# EAGLE board IMU_Digital_Combo_Board _-_6_Degrees_of_Freedom_-_ITG3200_-_ADXL345-Panel-v11 (EAGLE 6.5.0), part 1 of 4
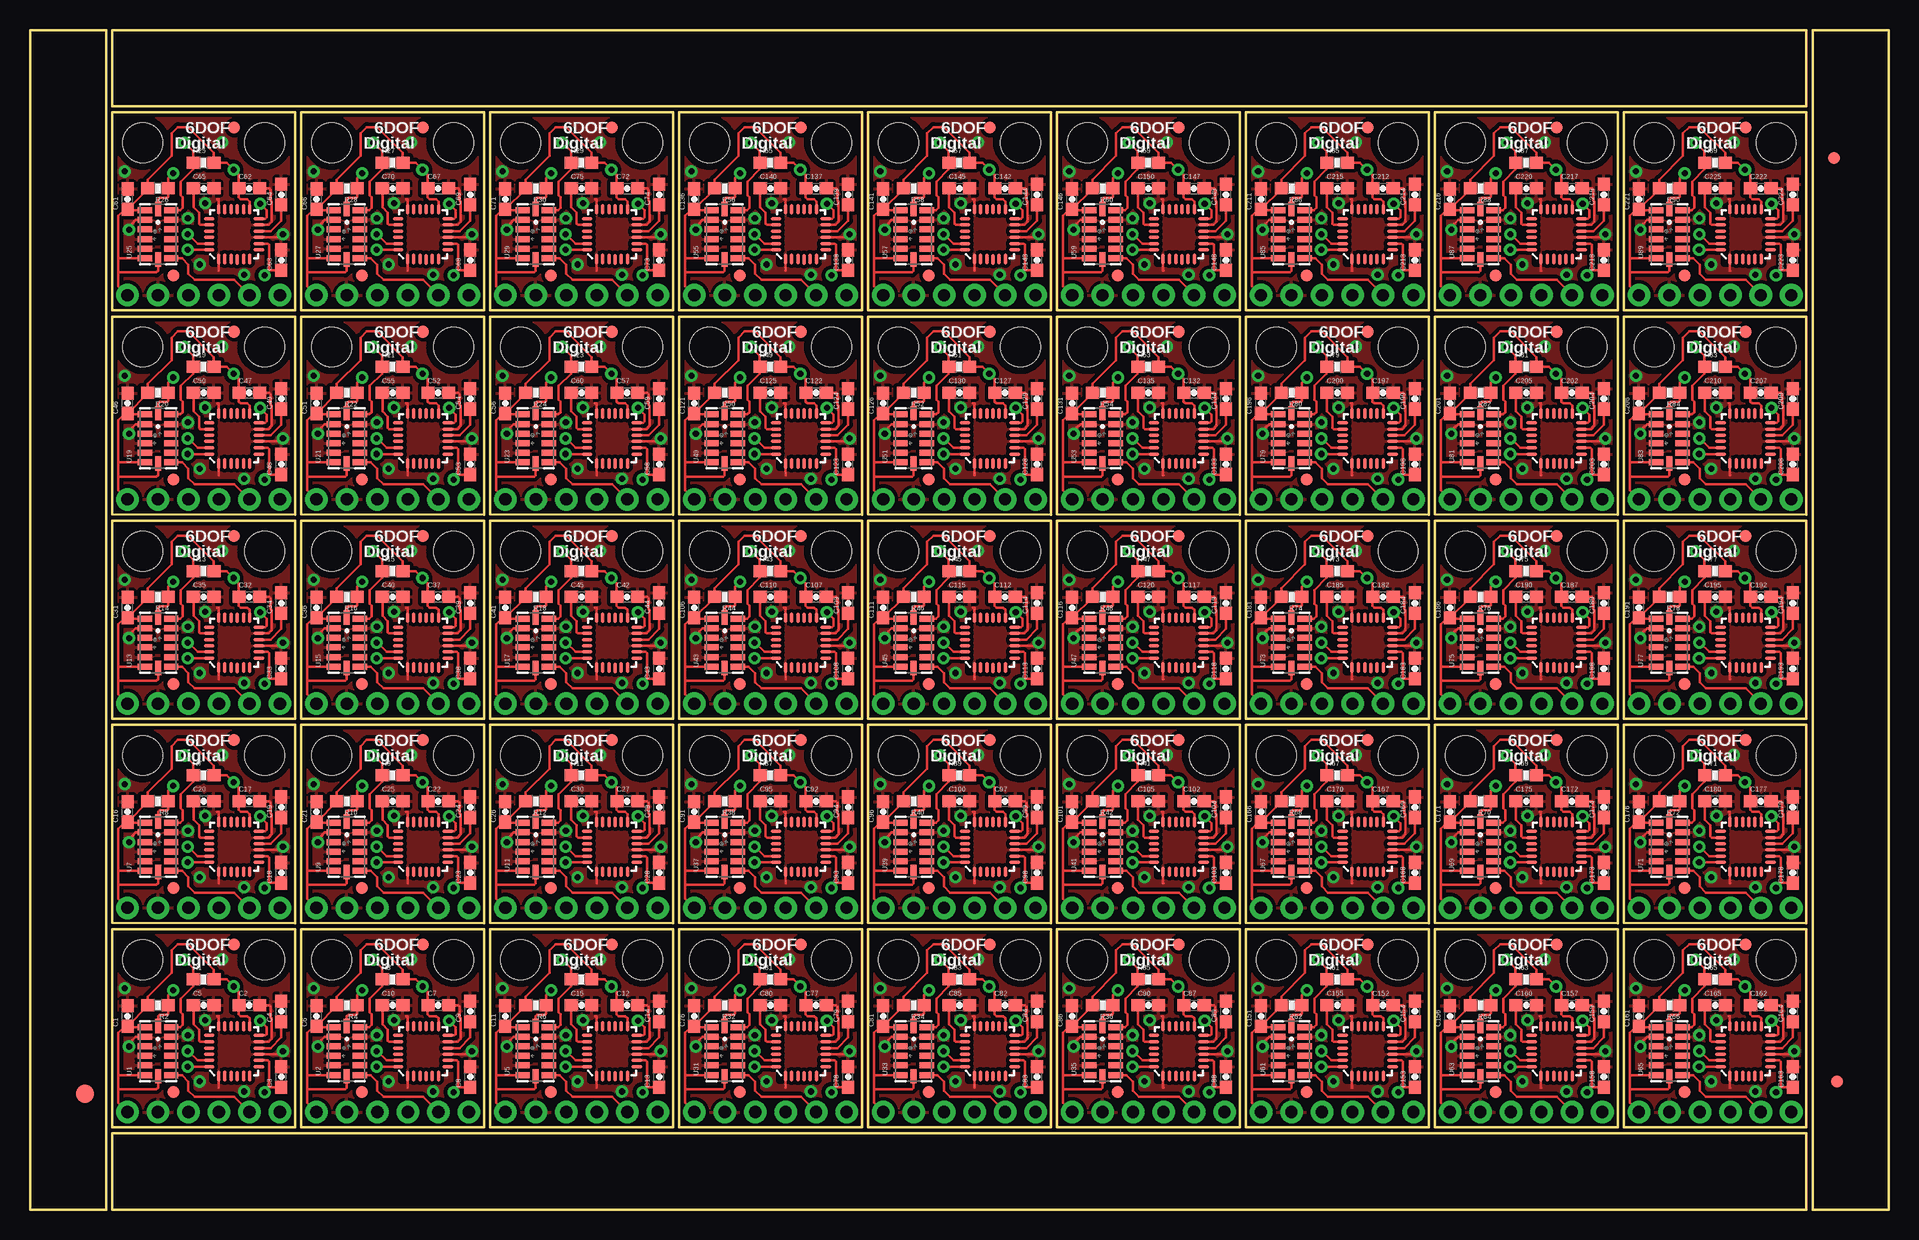
[diagram p0: board, top side]
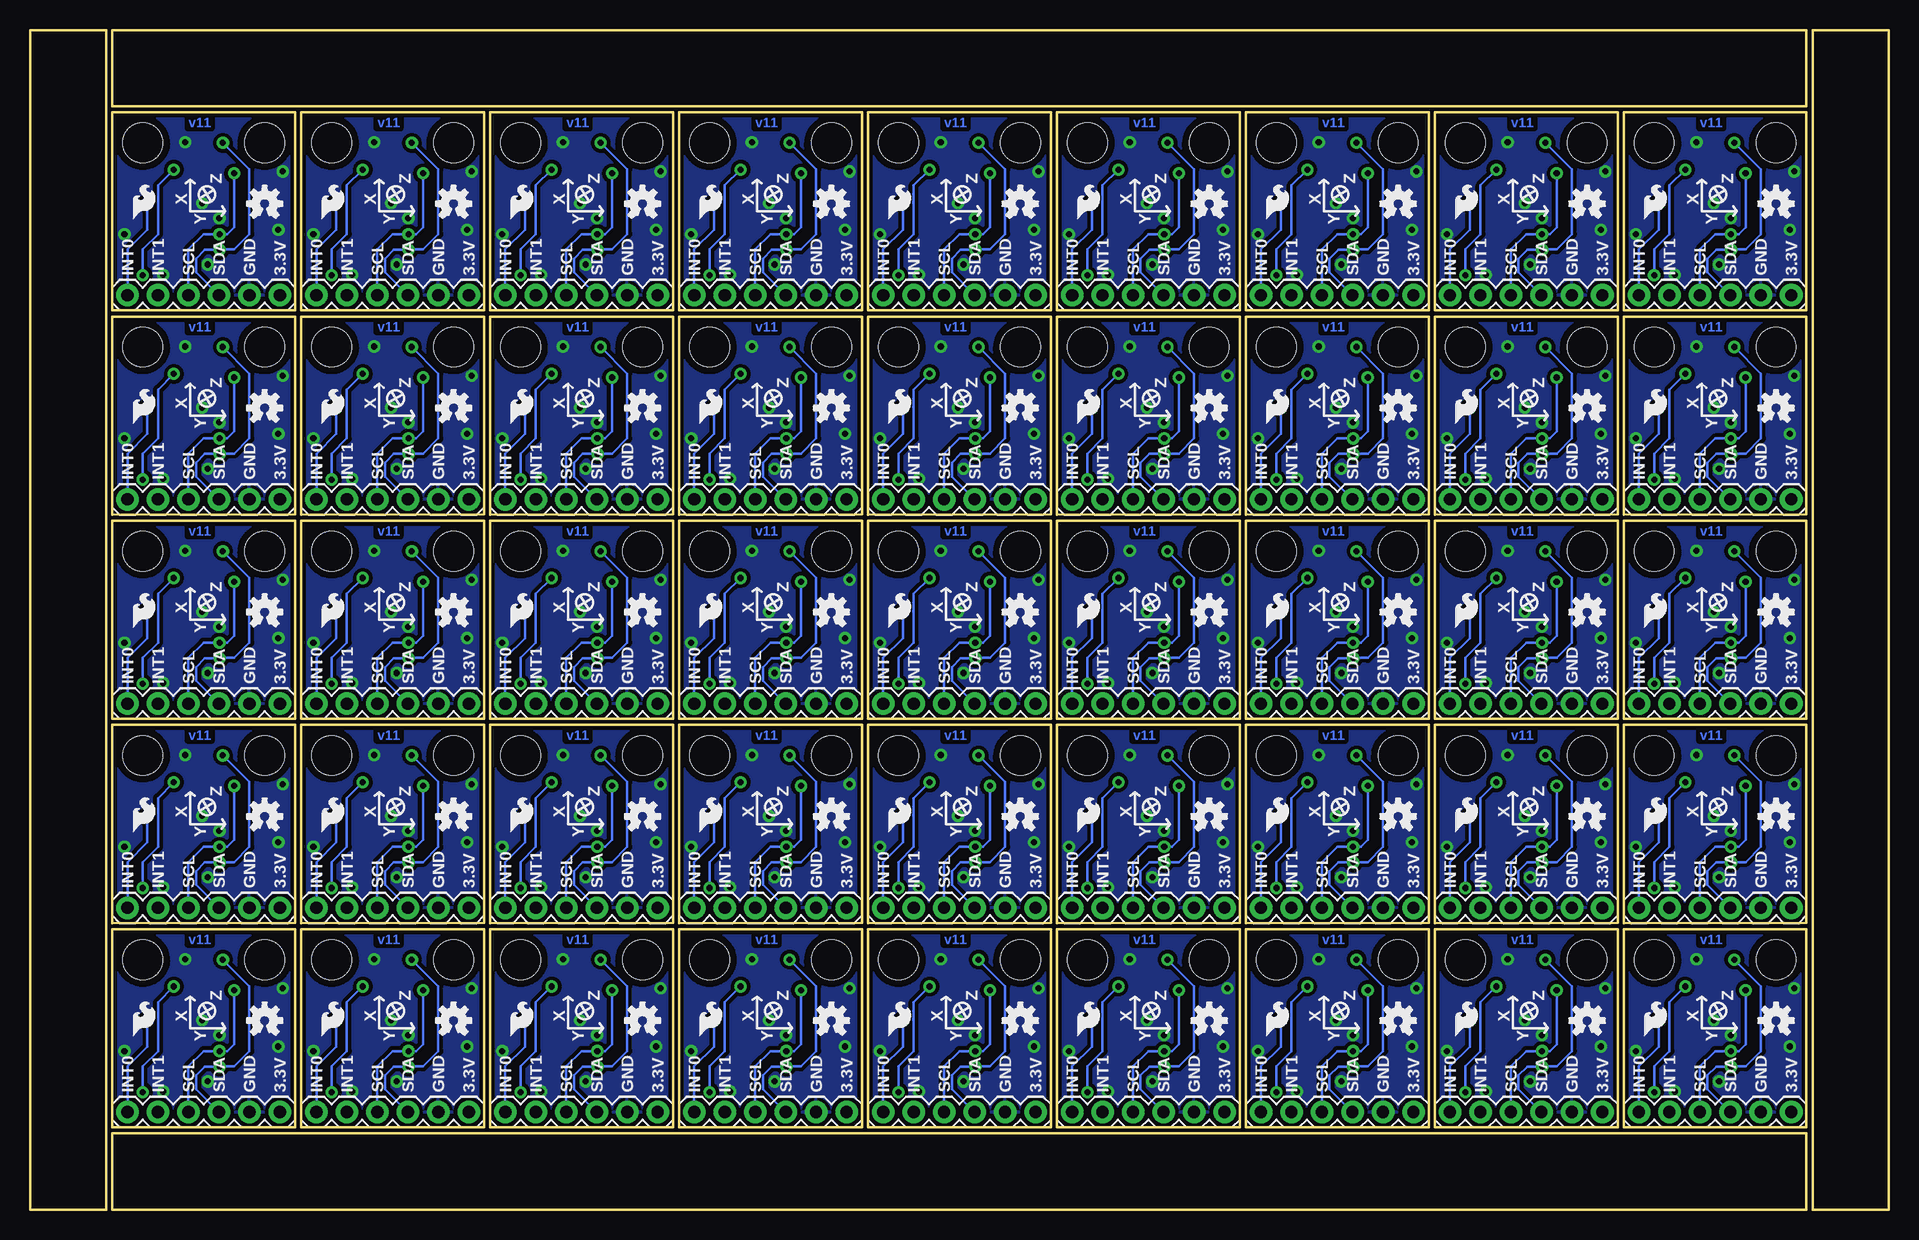
[diagram p1: board, bottom side, seen from below]

Size 154.94 x 98.3 mm. Coordinates in mm from the lower left corner, seen from the top.
Outline: 196 segments
Copper layers (1*16): Top 0.035mm / dielectric 1.5mm / Bottom 0.035mm
Design rules "SparkFun": minimum track width 8mil, minimum drill 20mil, track to track 8mil, track to pad 8mil, pad to pad 8mil, via to via 8mil, smd to smd 8mil, copper to edge 8mil, drill to drill 8mil, minimum pad ring 12mil, minimum via ring 10mil, stop-mask expansion 4mil, vias tented up to drill 20mil, thermal gap 10mil
tRestrict: area 15.2,10.8 to 15.5,11.3; area 15.4,15 to 15.5,15.5; area 10.3,12.6 to 10.7,13; area 9.5,12.3 to 9.7,12.5; area 31,10.8 to 31.2,11.3; area 31.1,15 to 31.2,15.5; area 26,12.6 to 26.4,13; area 25.2,12.3 to 25.4,12.5; area 46.7,10.8 to 47,11.3; area 46.9,15 to 47,15.5; area 41.8,12.6 to 42.2,13; area 41,12.3 to 41.2,12.5; 168 more areas

## Footprints (pad centres in the part's own frame; a part is rotated, then mirrored left to right if it is on the bottom)
0603-CAP = smd 1.1 x 1: 1 -0.85,0; 2 0.85,0
FIDUCIAL-1.5X3 = smd 1.5 x 1.5: 1 0,0
FIDUCIAL-1X2 = smd 1 x 1: 1 0,0
1X06 = drill 1.016 pad 1.88: 1 0,0; 2 2.54,0; 3 5.08,0; 4 7.62,0; 5 10.16,0; 6 12.7,0
STAND-OFF = hole 3.302: 0,0
0603-RES = smd 1.1 x 1: 1 -0.85,0; 2 0.85,0
LGA14 = smd 0.5 x 1.2: 1 2,1.1; 2 1.2,1.1; 3 0.4,1.1; 4 -0.4,1.1; 5 -1.2,1.1; 6 -2,1.1; 8 -2,-1.1; 9 -1.2,-1.1; 10 -0.4,-1.1; 11 0.4,-1.1; 12 1.2,-1.1; 13 2,-1.1 | smd 1.2 x 0.5: 7 -2.1,0; 14 2.1,0
QFN-24_ITG3200_1:1 = smd 0.889 x 0.279: 1 -2.076,1.301; 2 -2.076,0.775; 3 -2.076,0.25; 4 -2.102,-0.25; 5 -2.076,-0.775; 6 -2.076,-1.301; 13 2.076,-1.301; 14 2.076,-0.775; 15 2.076,-0.25; 16 2.076,0.25; 17 2.076,0.775; 18 2.076,1.301 | smd 0.279 x 0.889: 7 -1.301,-2.076; 8 -0.775,-2.076; 9 -0.25,-2.076; 10 0.25,-2.076; 11 0.775,-2.076; 12 1.301,-2.076; 19 1.301,2.076; 20 0.775,2.076; 21 0.25,2.076; 22 -0.25,2.076; 23 -0.775,2.076; 24 -1.301,2.076

## Placement (x,y rotation side)
C1  0.1uF  [0603-CAP]  8.13,16.13 90 top
C2  0.1uF  [0603-CAP]  18.29,17.02 0 top
C3  10nF  [0603-CAP]  20.95,11.05 90 top
C4  0.1uF  [0603-CAP]  20.95,16.51 90 top
C5  2.2nF  [0603-CAP]  14.48,17.02 0 top
C6  0.1uF  [0603-CAP]  23.88,16.13 90 top
C7  0.1uF  [0603-CAP]  34.04,17.02 0 top
C8  10nF  [0603-CAP]  36.7,11.05 90 top
C9  0.1uF  [0603-CAP]  36.7,16.51 90 top
C10  2.2nF  [0603-CAP]  30.23,17.02 0 top
C11  0.1uF  [0603-CAP]  39.62,16.13 90 top
C12  0.1uF  [0603-CAP]  49.78,17.02 0 top
C13  10nF  [0603-CAP]  52.45,11.05 90 top
C14  0.1uF  [0603-CAP]  52.45,16.51 90 top
C15  2.2nF  [0603-CAP]  45.97,17.02 0 top
C16  0.1uF  [0603-CAP]  8.13,33.15 90 top
C17  0.1uF  [0603-CAP]  18.29,34.04 0 top
C18  10nF  [0603-CAP]  20.95,28.07 90 top
C19  0.1uF  [0603-CAP]  20.95,33.53 90 top
C20  2.2nF  [0603-CAP]  14.48,34.04 0 top
C21  0.1uF  [0603-CAP]  23.88,33.15 90 top
C22  0.1uF  [0603-CAP]  34.04,34.04 0 top
C23  10nF  [0603-CAP]  36.7,28.07 90 top
C24  0.1uF  [0603-CAP]  36.7,33.53 90 top
C25  2.2nF  [0603-CAP]  30.23,34.04 0 top
C26  0.1uF  [0603-CAP]  39.62,33.15 90 top
C27  0.1uF  [0603-CAP]  49.78,34.04 0 top
C28  10nF  [0603-CAP]  52.45,28.07 90 top
C29  0.1uF  [0603-CAP]  52.45,33.53 90 top
C30  2.2nF  [0603-CAP]  45.97,34.04 0 top
C31  0.1uF  [0603-CAP]  8.13,50.16 90 top
C32  0.1uF  [0603-CAP]  18.29,51.05 0 top
C33  10nF  [0603-CAP]  20.95,45.09 90 top
C34  0.1uF  [0603-CAP]  20.95,50.55 90 top
C35  2.2nF  [0603-CAP]  14.48,51.05 0 top
C36  0.1uF  [0603-CAP]  23.88,50.16 90 top
C37  0.1uF  [0603-CAP]  34.04,51.05 0 top
C38  10nF  [0603-CAP]  36.7,45.09 90 top
C39  0.1uF  [0603-CAP]  36.7,50.55 90 top
C40  2.2nF  [0603-CAP]  30.23,51.05 0 top
C41  0.1uF  [0603-CAP]  39.62,50.16 90 top
C42  0.1uF  [0603-CAP]  49.78,51.05 0 top
C43  10nF  [0603-CAP]  52.45,45.09 90 top
C44  0.1uF  [0603-CAP]  52.45,50.55 90 top
C45  2.2nF  [0603-CAP]  45.97,51.05 0 top
C46  0.1uF  [0603-CAP]  8.13,67.18 90 top
C47  0.1uF  [0603-CAP]  18.29,68.07 0 top
C48  10nF  [0603-CAP]  20.95,62.1 90 top
C49  0.1uF  [0603-CAP]  20.95,67.56 90 top
C50  2.2nF  [0603-CAP]  14.48,68.07 0 top
C51  0.1uF  [0603-CAP]  23.88,67.18 90 top
C52  0.1uF  [0603-CAP]  34.04,68.07 0 top
C53  10nF  [0603-CAP]  36.7,62.1 90 top
C54  0.1uF  [0603-CAP]  36.7,67.56 90 top
C55  2.2nF  [0603-CAP]  30.23,68.07 0 top
C56  0.1uF  [0603-CAP]  39.62,67.18 90 top
C57  0.1uF  [0603-CAP]  49.78,68.07 0 top
C58  10nF  [0603-CAP]  52.45,62.1 90 top
C59  0.1uF  [0603-CAP]  52.45,67.56 90 top
C60  2.2nF  [0603-CAP]  45.97,68.07 0 top
C61  0.1uF  [0603-CAP]  8.13,84.2 90 top
C62  0.1uF  [0603-CAP]  18.29,85.09 0 top
C63  10nF  [0603-CAP]  20.95,79.12 90 top
C64  0.1uF  [0603-CAP]  20.95,84.58 90 top
C65  2.2nF  [0603-CAP]  14.48,85.09 0 top
C66  0.1uF  [0603-CAP]  23.88,84.2 90 top
C67  0.1uF  [0603-CAP]  34.04,85.09 0 top
C68  10nF  [0603-CAP]  36.7,79.12 90 top
C69  0.1uF  [0603-CAP]  36.7,84.58 90 top
C70  2.2nF  [0603-CAP]  30.23,85.09 0 top
C71  0.1uF  [0603-CAP]  39.62,84.2 90 top
C72  0.1uF  [0603-CAP]  49.78,85.09 0 top
C73  10nF  [0603-CAP]  52.45,79.12 90 top
C74  0.1uF  [0603-CAP]  52.45,84.58 90 top
C75  2.2nF  [0603-CAP]  45.97,85.09 0 top
C76  0.1uF  [0603-CAP]  55.37,16.13 90 top
C77  0.1uF  [0603-CAP]  65.53,17.02 0 top
C78  10nF  [0603-CAP]  68.2,11.05 90 top
C79  0.1uF  [0603-CAP]  68.2,16.51 90 top
C80  2.2nF  [0603-CAP]  61.72,17.02 0 top
C81  0.1uF  [0603-CAP]  71.12,16.13 90 top
C82  0.1uF  [0603-CAP]  81.28,17.02 0 top
C83  10nF  [0603-CAP]  83.95,11.05 90 top
C84  0.1uF  [0603-CAP]  83.95,16.51 90 top
C85  2.2nF  [0603-CAP]  77.47,17.02 0 top
C86  0.1uF  [0603-CAP]  86.87,16.13 90 top
C87  0.1uF  [0603-CAP]  97.03,17.02 0 top
C88  10nF  [0603-CAP]  99.69,11.05 90 top
C89  0.1uF  [0603-CAP]  99.69,16.51 90 top
C90  2.2nF  [0603-CAP]  93.22,17.02 0 top
C91  0.1uF  [0603-CAP]  55.37,33.15 90 top
C92  0.1uF  [0603-CAP]  65.53,34.04 0 top
C93  10nF  [0603-CAP]  68.2,28.07 90 top
C94  0.1uF  [0603-CAP]  68.2,33.53 90 top
C95  2.2nF  [0603-CAP]  61.72,34.04 0 top
C96  0.1uF  [0603-CAP]  71.12,33.15 90 top
C97  0.1uF  [0603-CAP]  81.28,34.04 0 top
C98  10nF  [0603-CAP]  83.95,28.07 90 top
C99  0.1uF  [0603-CAP]  83.95,33.53 90 top
C100  2.2nF  [0603-CAP]  77.47,34.04 0 top
C101  0.1uF  [0603-CAP]  86.87,33.15 90 top
C102  0.1uF  [0603-CAP]  97.03,34.04 0 top
C103  10nF  [0603-CAP]  99.69,28.07 90 top
C104  0.1uF  [0603-CAP]  99.69,33.53 90 top
C105  2.2nF  [0603-CAP]  93.22,34.04 0 top
C106  0.1uF  [0603-CAP]  55.37,50.16 90 top
C107  0.1uF  [0603-CAP]  65.53,51.05 0 top
C108  10nF  [0603-CAP]  68.2,45.09 90 top
C109  0.1uF  [0603-CAP]  68.2,50.55 90 top
C110  2.2nF  [0603-CAP]  61.72,51.05 0 top
C111  0.1uF  [0603-CAP]  71.12,50.16 90 top
C112  0.1uF  [0603-CAP]  81.28,51.05 0 top
C113  10nF  [0603-CAP]  83.95,45.09 90 top
C114  0.1uF  [0603-CAP]  83.95,50.55 90 top
C115  2.2nF  [0603-CAP]  77.47,51.05 0 top
C116  0.1uF  [0603-CAP]  86.87,50.16 90 top
C117  0.1uF  [0603-CAP]  97.03,51.05 0 top
C118  10nF  [0603-CAP]  99.69,45.09 90 top
C119  0.1uF  [0603-CAP]  99.69,50.55 90 top
C120  2.2nF  [0603-CAP]  93.22,51.05 0 top
C121  0.1uF  [0603-CAP]  55.37,67.18 90 top
C122  0.1uF  [0603-CAP]  65.53,68.07 0 top
C123  10nF  [0603-CAP]  68.2,62.1 90 top
C124  0.1uF  [0603-CAP]  68.2,67.56 90 top
C125  2.2nF  [0603-CAP]  61.72,68.07 0 top
C126  0.1uF  [0603-CAP]  71.12,67.18 90 top
C127  0.1uF  [0603-CAP]  81.28,68.07 0 top
C128  10nF  [0603-CAP]  83.95,62.1 90 top
C129  0.1uF  [0603-CAP]  83.95,67.56 90 top
C130  2.2nF  [0603-CAP]  77.47,68.07 0 top
C131  0.1uF  [0603-CAP]  86.87,67.18 90 top
C132  0.1uF  [0603-CAP]  97.03,68.07 0 top
C133  10nF  [0603-CAP]  99.69,62.1 90 top
C134  0.1uF  [0603-CAP]  99.69,67.56 90 top
C135  2.2nF  [0603-CAP]  93.22,68.07 0 top
C136  0.1uF  [0603-CAP]  55.37,84.2 90 top
C137  0.1uF  [0603-CAP]  65.53,85.09 0 top
C138  10nF  [0603-CAP]  68.2,79.12 90 top
C139  0.1uF  [0603-CAP]  68.2,84.58 90 top
C140  2.2nF  [0603-CAP]  61.72,85.09 0 top
C141  0.1uF  [0603-CAP]  71.12,84.2 90 top
C142  0.1uF  [0603-CAP]  81.28,85.09 0 top
C143  10nF  [0603-CAP]  83.95,79.12 90 top
C144  0.1uF  [0603-CAP]  83.95,84.58 90 top
C145  2.2nF  [0603-CAP]  77.47,85.09 0 top
C146  0.1uF  [0603-CAP]  86.87,84.2 90 top
C147  0.1uF  [0603-CAP]  97.03,85.09 0 top
C148  10nF  [0603-CAP]  99.69,79.12 90 top
C149  0.1uF  [0603-CAP]  99.69,84.58 90 top
C150  2.2nF  [0603-CAP]  93.22,85.09 0 top
C151  0.1uF  [0603-CAP]  102.62,16.13 90 top
C152  0.1uF  [0603-CAP]  112.78,17.02 0 top
C153  10nF  [0603-CAP]  115.44,11.05 90 top
C154  0.1uF  [0603-CAP]  115.44,16.51 90 top
C155  2.2nF  [0603-CAP]  108.97,17.02 0 top
C156  0.1uF  [0603-CAP]  118.36,16.13 90 top
C157  0.1uF  [0603-CAP]  128.52,17.02 0 top
C158  10nF  [0603-CAP]  131.19,11.05 90 top
C159  0.1uF  [0603-CAP]  131.19,16.51 90 top
C160  2.2nF  [0603-CAP]  124.71,17.02 0 top
C161  0.1uF  [0603-CAP]  134.11,16.13 90 top
C162  0.1uF  [0603-CAP]  144.27,17.02 0 top
C163  10nF  [0603-CAP]  146.94,11.05 90 top
C164  0.1uF  [0603-CAP]  146.94,16.51 90 top
C165  2.2nF  [0603-CAP]  140.46,17.02 0 top
C166  0.1uF  [0603-CAP]  102.62,33.15 90 top
C167  0.1uF  [0603-CAP]  112.78,34.04 0 top
C168  10nF  [0603-CAP]  115.44,28.07 90 top
C169  0.1uF  [0603-CAP]  115.44,33.53 90 top
C170  2.2nF  [0603-CAP]  108.97,34.04 0 top
C171  0.1uF  [0603-CAP]  118.36,33.15 90 top
C172  0.1uF  [0603-CAP]  128.52,34.04 0 top
C173  10nF  [0603-CAP]  131.19,28.07 90 top
C174  0.1uF  [0603-CAP]  131.19,33.53 90 top
C175  2.2nF  [0603-CAP]  124.71,34.04 0 top
C176  0.1uF  [0603-CAP]  134.11,33.15 90 top
C177  0.1uF  [0603-CAP]  144.27,34.04 0 top
C178  10nF  [0603-CAP]  146.94,28.07 90 top
C179  0.1uF  [0603-CAP]  146.94,33.53 90 top
C180  2.2nF  [0603-CAP]  140.46,34.04 0 top
C181  0.1uF  [0603-CAP]  102.62,50.16 90 top
C182  0.1uF  [0603-CAP]  112.78,51.05 0 top
C183  10nF  [0603-CAP]  115.44,45.09 90 top
C184  0.1uF  [0603-CAP]  115.44,50.55 90 top
C185  2.2nF  [0603-CAP]  108.97,51.05 0 top
C186  0.1uF  [0603-CAP]  118.36,50.16 90 top
C187  0.1uF  [0603-CAP]  128.52,51.05 0 top
C188  10nF  [0603-CAP]  131.19,45.09 90 top
C189  0.1uF  [0603-CAP]  131.19,50.55 90 top
C190  2.2nF  [0603-CAP]  124.71,51.05 0 top
C191  0.1uF  [0603-CAP]  134.11,50.16 90 top
C192  0.1uF  [0603-CAP]  144.27,51.05 0 top
C193  10nF  [0603-CAP]  146.94,45.09 90 top
C194  0.1uF  [0603-CAP]  146.94,50.55 90 top
C195  2.2nF  [0603-CAP]  140.46,51.05 0 top
C196  0.1uF  [0603-CAP]  102.62,67.18 90 top
C197  0.1uF  [0603-CAP]  112.78,68.07 0 top
C198  10nF  [0603-CAP]  115.44,62.1 90 top
C199  0.1uF  [0603-CAP]  115.44,67.56 90 top
C200  2.2nF  [0603-CAP]  108.97,68.07 0 top
C201  0.1uF  [0603-CAP]  118.36,67.18 90 top
C202  0.1uF  [0603-CAP]  128.52,68.07 0 top
C203  10nF  [0603-CAP]  131.19,62.1 90 top
C204  0.1uF  [0603-CAP]  131.19,67.56 90 top
C205  2.2nF  [0603-CAP]  124.71,68.07 0 top
C206  0.1uF  [0603-CAP]  134.11,67.18 90 top
C207  0.1uF  [0603-CAP]  144.27,68.07 0 top
C208  10nF  [0603-CAP]  146.94,62.1 90 top
C209  0.1uF  [0603-CAP]  146.94,67.56 90 top
C210  2.2nF  [0603-CAP]  140.46,68.07 0 top
C211  0.1uF  [0603-CAP]  102.62,84.2 90 top
C212  0.1uF  [0603-CAP]  112.78,85.09 0 top
C213  10nF  [0603-CAP]  115.44,79.12 90 top
C214  0.1uF  [0603-CAP]  115.44,84.58 90 top
C215  2.2nF  [0603-CAP]  108.97,85.09 0 top
C216  0.1uF  [0603-CAP]  118.36,84.2 90 top
C217  0.1uF  [0603-CAP]  128.52,85.09 0 top
C218  10nF  [0603-CAP]  131.19,79.12 90 top
C219  0.1uF  [0603-CAP]  131.19,84.58 90 top
C220  2.2nF  [0603-CAP]  124.71,85.09 0 top
C221  0.1uF  [0603-CAP]  134.11,84.2 90 top
C222  0.1uF  [0603-CAP]  144.27,85.09 0 top
C223  10nF  [0603-CAP]  146.94,79.12 90 top
C224  0.1uF  [0603-CAP]  146.94,84.58 90 top
C225  2.2nF  [0603-CAP]  140.46,85.09 0 top
E$1  [FIDUCIAL-1.5X3]  4.57,9.65 0 top
E$4  [FIDUCIAL-1X2]  150.62,10.67 0 top
E$6  [FIDUCIAL-1X2]  150.37,87.63 180 top
JP1  [1X06]  8.13,8.13 180 bottom
JP2  STAND-OFF  [STAND-OFF]  19.56,20.83 270 top
JP3  LOGO-SFESK  [SFE-LOGO-FLAME]  20.37,14.48 0 bottom
JP4  FIDUCIAL1X2  [FIDUCIAL-1X2]  17.02,22.1 0 top
JP5  STAND-OFF  [STAND-OFF]  9.4,20.83 270 top
JP6  FIDUCIAL1X2  [FIDUCIAL-1X2]  11.94,9.78 0 top
JP7  LOGO-SFESK  [SFE-LOGO-FLAME]  36.12,14.48 0 bottom
JP8  [1X06]  23.88,8.13 180 bottom
JP9  STAND-OFF  [STAND-OFF]  35.31,20.83 270 top
JP10  STAND-OFF  [STAND-OFF]  25.15,20.83 270 top
JP11  FIDUCIAL1X2  [FIDUCIAL-1X2]  32.77,22.1 0 top
JP12  FIDUCIAL1X2  [FIDUCIAL-1X2]  27.69,9.78 0 top
JP13  LOGO-SFESK  [SFE-LOGO-FLAME]  51.87,14.48 0 bottom
JP14  [1X06]  39.62,8.13 180 bottom
JP15  STAND-OFF  [STAND-OFF]  51.05,20.83 270 top
JP16  STAND-OFF  [STAND-OFF]  40.89,20.83 270 top
JP17  FIDUCIAL1X2  [FIDUCIAL-1X2]  48.51,22.1 0 top
JP18  FIDUCIAL1X2  [FIDUCIAL-1X2]  43.43,9.78 0 top
JP19  LOGO-SFESK  [SFE-LOGO-FLAME]  20.37,31.5 0 bottom
JP20  [1X06]  8.13,25.15 180 bottom
JP21  STAND-OFF  [STAND-OFF]  19.56,37.85 270 top
JP22  STAND-OFF  [STAND-OFF]  9.4,37.85 270 top
JP23  FIDUCIAL1X2  [FIDUCIAL-1X2]  17.02,39.12 0 top
JP24  FIDUCIAL1X2  [FIDUCIAL-1X2]  11.94,26.8 0 top
JP25  LOGO-SFESK  [SFE-LOGO-FLAME]  36.12,31.5 0 bottom
JP26  [1X06]  23.88,25.15 180 bottom
JP27  STAND-OFF  [STAND-OFF]  35.31,37.85 270 top
JP28  STAND-OFF  [STAND-OFF]  25.15,37.85 270 top
JP29  FIDUCIAL1X2  [FIDUCIAL-1X2]  32.77,39.12 0 top
JP30  FIDUCIAL1X2  [FIDUCIAL-1X2]  27.69,26.8 0 top
JP31  LOGO-SFESK  [SFE-LOGO-FLAME]  51.87,31.5 0 bottom
JP32  [1X06]  39.62,25.15 180 bottom
JP33  STAND-OFF  [STAND-OFF]  51.05,37.85 270 top
JP34  STAND-OFF  [STAND-OFF]  40.89,37.85 270 top
JP35  FIDUCIAL1X2  [FIDUCIAL-1X2]  48.51,39.12 0 top
JP36  FIDUCIAL1X2  [FIDUCIAL-1X2]  43.43,26.8 0 top
JP37  LOGO-SFESK  [SFE-LOGO-FLAME]  20.37,48.51 0 bottom
JP38  [1X06]  8.13,42.16 180 bottom
JP39  STAND-OFF  [STAND-OFF]  19.56,54.86 270 top
JP40  STAND-OFF  [STAND-OFF]  9.4,54.86 270 top
JP41  FIDUCIAL1X2  [FIDUCIAL-1X2]  17.02,56.13 0 top
JP42  FIDUCIAL1X2  [FIDUCIAL-1X2]  11.94,43.81 0 top
JP43  LOGO-SFESK  [SFE-LOGO-FLAME]  36.12,48.51 0 bottom
JP44  [1X06]  23.88,42.16 180 bottom
JP45  STAND-OFF  [STAND-OFF]  35.31,54.86 270 top
JP46  STAND-OFF  [STAND-OFF]  25.15,54.86 270 top
JP47  FIDUCIAL1X2  [FIDUCIAL-1X2]  32.77,56.13 0 top
JP48  FIDUCIAL1X2  [FIDUCIAL-1X2]  27.69,43.81 0 top
JP49  LOGO-SFESK  [SFE-LOGO-FLAME]  51.87,48.51 0 bottom
JP50  [1X06]  39.62,42.16 180 bottom
JP51  STAND-OFF  [STAND-OFF]  51.05,54.86 270 top
JP52  STAND-OFF  [STAND-OFF]  40.89,54.86 270 top
JP53  FIDUCIAL1X2  [FIDUCIAL-1X2]  48.51,56.13 0 top
JP54  FIDUCIAL1X2  [FIDUCIAL-1X2]  43.43,43.81 0 top
JP55  LOGO-SFESK  [SFE-LOGO-FLAME]  20.37,65.53 0 bottom
JP56  [1X06]  8.13,59.18 180 bottom
JP57  STAND-OFF  [STAND-OFF]  19.56,71.88 270 top
JP58  STAND-OFF  [STAND-OFF]  9.4,71.88 270 top
JP59  FIDUCIAL1X2  [FIDUCIAL-1X2]  17.02,73.15 0 top
JP60  FIDUCIAL1X2  [FIDUCIAL-1X2]  11.94,60.83 0 top
JP61  LOGO-SFESK  [SFE-LOGO-FLAME]  36.12,65.53 0 bottom
JP62  [1X06]  23.88,59.18 180 bottom
JP63  STAND-OFF  [STAND-OFF]  35.31,71.88 270 top
JP64  STAND-OFF  [STAND-OFF]  25.15,71.88 270 top
JP65  FIDUCIAL1X2  [FIDUCIAL-1X2]  32.77,73.15 0 top
JP66  FIDUCIAL1X2  [FIDUCIAL-1X2]  27.69,60.83 0 top
JP67  LOGO-SFESK  [SFE-LOGO-FLAME]  51.87,65.53 0 bottom
JP68  [1X06]  39.62,59.18 180 bottom
JP69  STAND-OFF  [STAND-OFF]  51.05,71.88 270 top
JP70  STAND-OFF  [STAND-OFF]  40.89,71.88 270 top
JP71  FIDUCIAL1X2  [FIDUCIAL-1X2]  48.51,73.15 0 top
JP72  FIDUCIAL1X2  [FIDUCIAL-1X2]  43.43,60.83 0 top
JP73  LOGO-SFESK  [SFE-LOGO-FLAME]  20.37,82.55 0 bottom
JP74  [1X06]  8.13,76.2 180 bottom
JP75  STAND-OFF  [STAND-OFF]  19.56,88.9 270 top
JP76  STAND-OFF  [STAND-OFF]  9.4,88.9 270 top
JP77  FIDUCIAL1X2  [FIDUCIAL-1X2]  17.02,90.17 0 top
JP78  FIDUCIAL1X2  [FIDUCIAL-1X2]  11.94,77.85 0 top
JP79  LOGO-SFESK  [SFE-LOGO-FLAME]  36.12,82.55 0 bottom
JP80  [1X06]  23.88,76.2 180 bottom
JP81  STAND-OFF  [STAND-OFF]  35.31,88.9 270 top
JP82  STAND-OFF  [STAND-OFF]  25.15,88.9 270 top
JP83  FIDUCIAL1X2  [FIDUCIAL-1X2]  32.77,90.17 0 top
JP84  FIDUCIAL1X2  [FIDUCIAL-1X2]  27.69,77.85 0 top
JP85  LOGO-SFESK  [SFE-LOGO-FLAME]  51.87,82.55 0 bottom
JP86  [1X06]  39.62,76.2 180 bottom
JP87  STAND-OFF  [STAND-OFF]  51.05,88.9 270 top
JP88  STAND-OFF  [STAND-OFF]  40.89,88.9 270 top
JP89  FIDUCIAL1X2  [FIDUCIAL-1X2]  48.51,90.17 0 top
JP90  FIDUCIAL1X2  [FIDUCIAL-1X2]  43.43,77.85 0 top
JP91  LOGO-SFESK  [SFE-LOGO-FLAME]  67.61,14.48 0 bottom
JP92  [1X06]  55.37,8.13 180 bottom
JP93  STAND-OFF  [STAND-OFF]  66.8,20.83 270 top
JP94  STAND-OFF  [STAND-OFF]  56.64,20.83 270 top
JP95  FIDUCIAL1X2  [FIDUCIAL-1X2]  64.26,22.1 0 top
JP96  FIDUCIAL1X2  [FIDUCIAL-1X2]  59.18,9.78 0 top
JP97  LOGO-SFESK  [SFE-LOGO-FLAME]  83.36,14.48 0 bottom
JP98  [1X06]  71.12,8.13 180 bottom
JP99  STAND-OFF  [STAND-OFF]  82.55,20.83 270 top
JP100  STAND-OFF  [STAND-OFF]  72.39,20.83 270 top
JP101  FIDUCIAL1X2  [FIDUCIAL-1X2]  80.01,22.1 0 top
JP102  FIDUCIAL1X2  [FIDUCIAL-1X2]  74.93,9.78 0 top
JP103  LOGO-SFESK  [SFE-LOGO-FLAME]  99.11,14.48 0 bottom
JP104  [1X06]  86.87,8.13 180 bottom
JP105  STAND-OFF  [STAND-OFF]  98.3,20.83 270 top
JP106  STAND-OFF  [STAND-OFF]  88.14,20.83 270 top
JP107  FIDUCIAL1X2  [FIDUCIAL-1X2]  95.76,22.1 0 top
JP108  FIDUCIAL1X2  [FIDUCIAL-1X2]  90.68,9.78 0 top
JP109  LOGO-SFESK  [SFE-LOGO-FLAME]  67.61,31.5 0 bottom
JP110  [1X06]  55.37,25.15 180 bottom
JP111  STAND-OFF  [STAND-OFF]  66.8,37.85 270 top
JP112  STAND-OFF  [STAND-OFF]  56.64,37.85 270 top
JP113  FIDUCIAL1X2  [FIDUCIAL-1X2]  64.26,39.12 0 top
JP114  FIDUCIAL1X2  [FIDUCIAL-1X2]  59.18,26.8 0 top
JP115  LOGO-SFESK  [SFE-LOGO-FLAME]  83.36,31.5 0 bottom
JP116  [1X06]  71.12,25.15 180 bottom
JP117  STAND-OFF  [STAND-OFF]  82.55,37.85 270 top
JP118  STAND-OFF  [STAND-OFF]  72.39,37.85 270 top
JP119  FIDUCIAL1X2  [FIDUCIAL-1X2]  80.01,39.12 0 top
JP120  FIDUCIAL1X2  [FIDUCIAL-1X2]  74.93,26.8 0 top
JP121  LOGO-SFESK  [SFE-LOGO-FLAME]  99.11,31.5 0 bottom
JP122  [1X06]  86.87,25.15 180 bottom
JP123  STAND-OFF  [STAND-OFF]  98.3,37.85 270 top
JP124  STAND-OFF  [STAND-OFF]  88.14,37.85 270 top
JP125  FIDUCIAL1X2  [FIDUCIAL-1X2]  95.76,39.12 0 top
JP126  FIDUCIAL1X2  [FIDUCIAL-1X2]  90.68,26.8 0 top
JP127  LOGO-SFESK  [SFE-LOGO-FLAME]  67.61,48.51 0 bottom
JP128  [1X06]  55.37,42.16 180 bottom
JP129  STAND-OFF  [STAND-OFF]  66.8,54.86 270 top
JP130  STAND-OFF  [STAND-OFF]  56.64,54.86 270 top
JP131  FIDUCIAL1X2  [FIDUCIAL-1X2]  64.26,56.13 0 top
JP132  FIDUCIAL1X2  [FIDUCIAL-1X2]  59.18,43.81 0 top
JP133  LOGO-SFESK  [SFE-LOGO-FLAME]  83.36,48.51 0 bottom
JP134  [1X06]  71.12,42.16 180 bottom
JP135  STAND-OFF  [STAND-OFF]  82.55,54.86 270 top
JP136  STAND-OFF  [STAND-OFF]  72.39,54.86 270 top
JP137  FIDUCIAL1X2  [FIDUCIAL-1X2]  80.01,56.13 0 top
JP138  FIDUCIAL1X2  [FIDUCIAL-1X2]  74.93,43.81 0 top
JP139  LOGO-SFESK  [SFE-LOGO-FLAME]  99.11,48.51 0 bottom
JP140  [1X06]  86.87,42.16 180 bottom
JP141  STAND-OFF  [STAND-OFF]  98.3,54.86 270 top
JP142  STAND-OFF  [STAND-OFF]  88.14,54.86 270 top
JP143  FIDUCIAL1X2  [FIDUCIAL-1X2]  95.76,56.13 0 top
JP144  FIDUCIAL1X2  [FIDUCIAL-1X2]  90.68,43.81 0 top
JP145  LOGO-SFESK  [SFE-LOGO-FLAME]  67.61,65.53 0 bottom
JP146  [1X06]  55.37,59.18 180 bottom
JP147  STAND-OFF  [STAND-OFF]  66.8,71.88 270 top
JP148  STAND-OFF  [STAND-OFF]  56.64,71.88 270 top
JP149  FIDUCIAL1X2  [FIDUCIAL-1X2]  64.26,73.15 0 top
JP150  FIDUCIAL1X2  [FIDUCIAL-1X2]  59.18,60.83 0 top
JP151  LOGO-SFESK  [SFE-LOGO-FLAME]  83.36,65.53 0 bottom
JP152  [1X06]  71.12,59.18 180 bottom
JP153  STAND-OFF  [STAND-OFF]  82.55,71.88 270 top
JP154  STAND-OFF  [STAND-OFF]  72.39,71.88 270 top
JP155  FIDUCIAL1X2  [FIDUCIAL-1X2]  80.01,73.15 0 top
JP156  FIDUCIAL1X2  [FIDUCIAL-1X2]  74.93,60.83 0 top
JP157  LOGO-SFESK  [SFE-LOGO-FLAME]  99.11,65.53 0 bottom
JP158  [1X06]  86.87,59.18 180 bottom
JP159  STAND-OFF  [STAND-OFF]  98.3,71.88 270 top
JP160  STAND-OFF  [STAND-OFF]  88.14,71.88 270 top
JP161  FIDUCIAL1X2  [FIDUCIAL-1X2]  95.76,73.15 0 top
JP162  FIDUCIAL1X2  [FIDUCIAL-1X2]  90.68,60.83 0 top
JP163  LOGO-SFESK  [SFE-LOGO-FLAME]  67.61,82.55 0 bottom
JP164  [1X06]  55.37,76.2 180 bottom
JP165  STAND-OFF  [STAND-OFF]  66.8,88.9 270 top
JP166  STAND-OFF  [STAND-OFF]  56.64,88.9 270 top
JP167  FIDUCIAL1X2  [FIDUCIAL-1X2]  64.26,90.17 0 top
JP168  FIDUCIAL1X2  [FIDUCIAL-1X2]  59.18,77.85 0 top
JP169  LOGO-SFESK  [SFE-LOGO-FLAME]  83.36,82.55 0 bottom
JP170  [1X06]  71.12,76.2 180 bottom
JP171  STAND-OFF  [STAND-OFF]  82.55,88.9 270 top
JP172  STAND-OFF  [STAND-OFF]  72.39,88.9 270 top
JP173  FIDUCIAL1X2  [FIDUCIAL-1X2]  80.01,90.17 0 top
JP174  FIDUCIAL1X2  [FIDUCIAL-1X2]  74.93,77.85 0 top
JP175  LOGO-SFESK  [SFE-LOGO-FLAME]  99.11,82.55 0 bottom
JP176  [1X06]  86.87,76.2 180 bottom
JP177  STAND-OFF  [STAND-OFF]  98.3,88.9 270 top
JP178  STAND-OFF  [STAND-OFF]  88.14,88.9 270 top
JP179  FIDUCIAL1X2  [FIDUCIAL-1X2]  95.76,90.17 0 top
JP180  FIDUCIAL1X2  [FIDUCIAL-1X2]  90.68,77.85 0 top
JP181  LOGO-SFESK  [SFE-LOGO-FLAME]  114.86,14.48 0 bottom
JP182  [1X06]  102.62,8.13 180 bottom
JP183  STAND-OFF  [STAND-OFF]  114.05,20.83 270 top
JP184  STAND-OFF  [STAND-OFF]  103.89,20.83 270 top
JP185  FIDUCIAL1X2  [FIDUCIAL-1X2]  111.51,22.1 0 top
JP186  FIDUCIAL1X2  [FIDUCIAL-1X2]  106.43,9.78 0 top
JP187  LOGO-SFESK  [SFE-LOGO-FLAME]  130.61,14.48 0 bottom
JP188  [1X06]  118.36,8.13 180 bottom
JP189  STAND-OFF  [STAND-OFF]  129.79,20.83 270 top
JP190  STAND-OFF  [STAND-OFF]  119.63,20.83 270 top
JP191  FIDUCIAL1X2  [FIDUCIAL-1X2]  127.25,22.1 0 top
JP192  FIDUCIAL1X2  [FIDUCIAL-1X2]  122.17,9.78 0 top
JP193  LOGO-SFESK  [SFE-LOGO-FLAME]  146.35,14.48 0 bottom
JP194  [1X06]  134.11,8.13 180 bottom
JP195  STAND-OFF  [STAND-OFF]  145.54,20.83 270 top
JP196  STAND-OFF  [STAND-OFF]  135.38,20.83 270 top
JP197  FIDUCIAL1X2  [FIDUCIAL-1X2]  143,22.1 0 top
JP198  FIDUCIAL1X2  [FIDUCIAL-1X2]  137.92,9.78 0 top
JP199  LOGO-SFESK  [SFE-LOGO-FLAME]  114.86,31.5 0 bottom
JP200  [1X06]  102.62,25.15 180 bottom
JP201  STAND-OFF  [STAND-OFF]  114.05,37.85 270 top
JP202  STAND-OFF  [STAND-OFF]  103.89,37.85 270 top
JP203  FIDUCIAL1X2  [FIDUCIAL-1X2]  111.51,39.12 0 top
JP204  FIDUCIAL1X2  [FIDUCIAL-1X2]  106.43,26.8 0 top
JP205  LOGO-SFESK  [SFE-LOGO-FLAME]  130.61,31.5 0 bottom
JP206  [1X06]  118.36,25.15 180 bottom
JP207  STAND-OFF  [STAND-OFF]  129.79,37.85 270 top
JP208  STAND-OFF  [STAND-OFF]  119.63,37.85 270 top
JP209  FIDUCIAL1X2  [FIDUCIAL-1X2]  127.25,39.12 0 top
JP210  FIDUCIAL1X2  [FIDUCIAL-1X2]  122.17,26.8 0 top
JP211  LOGO-SFESK  [SFE-LOGO-FLAME]  146.35,31.5 0 bottom
JP212  [1X06]  134.11,25.15 180 bottom
JP213  STAND-OFF  [STAND-OFF]  145.54,37.85 270 top
JP214  STAND-OFF  [STAND-OFF]  135.38,37.85 270 top
JP215  FIDUCIAL1X2  [FIDUCIAL-1X2]  143,39.12 0 top
JP216  FIDUCIAL1X2  [FIDUCIAL-1X2]  137.92,26.8 0 top
JP217  LOGO-SFESK  [SFE-LOGO-FLAME]  114.86,48.51 0 bottom
JP218  [1X06]  102.62,42.16 180 bottom
JP219  STAND-OFF  [STAND-OFF]  114.05,54.86 270 top
JP220  STAND-OFF  [STAND-OFF]  103.89,54.86 270 top
JP221  FIDUCIAL1X2  [FIDUCIAL-1X2]  111.51,56.13 0 top
JP222  FIDUCIAL1X2  [FIDUCIAL-1X2]  106.43,43.81 0 top
JP223  LOGO-SFESK  [SFE-LOGO-FLAME]  130.61,48.51 0 bottom
JP224  [1X06]  118.36,42.16 180 bottom
JP225  STAND-OFF  [STAND-OFF]  129.79,54.86 270 top
JP226  STAND-OFF  [STAND-OFF]  119.63,54.86 270 top
JP227  FIDUCIAL1X2  [FIDUCIAL-1X2]  127.25,56.13 0 top
JP228  FIDUCIAL1X2  [FIDUCIAL-1X2]  122.17,43.81 0 top
JP229  LOGO-SFESK  [SFE-LOGO-FLAME]  146.35,48.51 0 bottom
JP230  [1X06]  134.11,42.16 180 bottom
JP231  STAND-OFF  [STAND-OFF]  145.54,54.86 270 top
JP232  STAND-OFF  [STAND-OFF]  135.38,54.86 270 top
JP233  FIDUCIAL1X2  [FIDUCIAL-1X2]  143,56.13 0 top
JP234  FIDUCIAL1X2  [FIDUCIAL-1X2]  137.92,43.81 0 top
JP235  LOGO-SFESK  [SFE-LOGO-FLAME]  114.86,65.53 0 bottom
JP236  [1X06]  102.62,59.18 180 bottom
JP237  STAND-OFF  [STAND-OFF]  114.05,71.88 270 top
JP238  STAND-OFF  [STAND-OFF]  103.89,71.88 270 top
JP239  FIDUCIAL1X2  [FIDUCIAL-1X2]  111.51,73.15 0 top
JP240  FIDUCIAL1X2  [FIDUCIAL-1X2]  106.43,60.83 0 top
JP241  LOGO-SFESK  [SFE-LOGO-FLAME]  130.61,65.53 0 bottom
JP242  [1X06]  118.36,59.18 180 bottom
JP243  STAND-OFF  [STAND-OFF]  129.79,71.88 270 top
JP244  STAND-OFF  [STAND-OFF]  119.63,71.88 270 top
JP245  FIDUCIAL1X2  [FIDUCIAL-1X2]  127.25,73.15 0 top
JP246  FIDUCIAL1X2  [FIDUCIAL-1X2]  122.17,60.83 0 top
JP247  LOGO-SFESK  [SFE-LOGO-FLAME]  146.35,65.53 0 bottom
JP248  [1X06]  134.11,59.18 180 bottom
JP249  STAND-OFF  [STAND-OFF]  145.54,71.88 270 top
JP250  STAND-OFF  [STAND-OFF]  135.38,71.88 270 top
JP251  FIDUCIAL1X2  [FIDUCIAL-1X2]  143,73.15 0 top
JP252  FIDUCIAL1X2  [FIDUCIAL-1X2]  137.92,60.83 0 top
JP253  LOGO-SFESK  [SFE-LOGO-FLAME]  114.86,82.55 0 bottom
JP254  [1X06]  102.62,76.2 180 bottom
JP255  STAND-OFF  [STAND-OFF]  114.05,88.9 270 top
JP256  STAND-OFF  [STAND-OFF]  103.89,88.9 270 top
JP257  FIDUCIAL1X2  [FIDUCIAL-1X2]  111.51,90.17 0 top
JP258  FIDUCIAL1X2  [FIDUCIAL-1X2]  106.43,77.85 0 top
JP259  LOGO-SFESK  [SFE-LOGO-FLAME]  130.61,82.55 0 bottom
JP260  [1X06]  118.36,76.2 180 bottom
JP261  STAND-OFF  [STAND-OFF]  129.79,88.9 270 top
JP262  STAND-OFF  [STAND-OFF]  119.63,88.9 270 top
JP263  FIDUCIAL1X2  [FIDUCIAL-1X2]  127.25,90.17 0 top
JP264  FIDUCIAL1X2  [FIDUCIAL-1X2]  122.17,77.85 0 top
JP265  LOGO-SFESK  [SFE-LOGO-FLAME]  146.35,82.55 0 bottom
JP266  [1X06]  134.11,76.2 180 bottom
JP267  STAND-OFF  [STAND-OFF]  145.54,88.9 270 top
JP268  STAND-OFF  [STAND-OFF]  135.38,88.9 270 top
JP269  FIDUCIAL1X2  [FIDUCIAL-1X2]  143,90.17 0 top
JP270  FIDUCIAL1X2  [FIDUCIAL-1X2]  137.92,77.85 0 top
R1  4.7K  [0603-RES]  14.48,19.18 0 top
R2  4.7k  [0603-RES]  10.67,17.02 180 top
R3  4.7K  [0603-RES]  30.23,19.18 0 top
R4  4.7k  [0603-RES]  26.42,17.02 180 top
R5  4.7K  [0603-RES]  45.97,19.18 0 top
R6  4.7k  [0603-RES]  42.16,17.02 180 top
R7  4.7K  [0603-RES]  14.48,36.2 0 top
R8  4.7k  [0603-RES]  10.67,34.04 180 top
R9  4.7K  [0603-RES]  30.23,36.2 0 top
R10  4.7k  [0603-RES]  26.42,34.04 180 top
R11  4.7K  [0603-RES]  45.97,36.2 0 top
R12  4.7k  [0603-RES]  42.16,34.04 180 top
R13  4.7K  [0603-RES]  14.48,53.21 0 top
R14  4.7k  [0603-RES]  10.67,51.05 180 top
R15  4.7K  [0603-RES]  30.23,53.21 0 top
R16  4.7k  [0603-RES]  26.42,51.05 180 top
R17  4.7K  [0603-RES]  45.97,53.21 0 top
R18  4.7k  [0603-RES]  42.16,51.05 180 top
R19  4.7K  [0603-RES]  14.48,70.23 0 top
R20  4.7k  [0603-RES]  10.67,68.07 180 top
R21  4.7K  [0603-RES]  30.23,70.23 0 top
R22  4.7k  [0603-RES]  26.42,68.07 180 top
R23  4.7K  [0603-RES]  45.97,70.23 0 top
R24  4.7k  [0603-RES]  42.16,68.07 180 top
R25  4.7K  [0603-RES]  14.48,87.25 0 top
R26  4.7k  [0603-RES]  10.67,85.09 180 top
R27  4.7K  [0603-RES]  30.23,87.25 0 top
R28  4.7k  [0603-RES]  26.42,85.09 180 top
R29  4.7K  [0603-RES]  45.97,87.25 0 top
R30  4.7k  [0603-RES]  42.16,85.09 180 top
R31  4.7K  [0603-RES]  61.72,19.18 0 top
R32  4.7k  [0603-RES]  57.91,17.02 180 top
R33  4.7K  [0603-RES]  77.47,19.18 0 top
R34  4.7k  [0603-RES]  73.66,17.02 180 top
R35  4.7K  [0603-RES]  93.22,19.18 0 top
R36  4.7k  [0603-RES]  89.41,17.02 180 top
R37  4.7K  [0603-RES]  61.72,36.2 0 top
R38  4.7k  [0603-RES]  57.91,34.04 180 top
R39  4.7K  [0603-RES]  77.47,36.2 0 top
R40  4.7k  [0603-RES]  73.66,34.04 180 top
R41  4.7K  [0603-RES]  93.22,36.2 0 top
R42  4.7k  [0603-RES]  89.41,34.04 180 top
R43  4.7K  [0603-RES]  61.72,53.21 0 top
R44  4.7k  [0603-RES]  57.91,51.05 180 top
R45  4.7K  [0603-RES]  77.47,53.21 0 top
R46  4.7k  [0603-RES]  73.66,51.05 180 top
R47  4.7K  [0603-RES]  93.22,53.21 0 top
R48  4.7k  [0603-RES]  89.41,51.05 180 top
R49  4.7K  [0603-RES]  61.72,70.23 0 top
R50  4.7k  [0603-RES]  57.91,68.07 180 top
R51  4.7K  [0603-RES]  77.47,70.23 0 top
R52  4.7k  [0603-RES]  73.66,68.07 180 top
R53  4.7K  [0603-RES]  93.22,70.23 0 top
R54  4.7k  [0603-RES]  89.41,68.07 180 top
R55  4.7K  [0603-RES]  61.72,87.25 0 top
R56  4.7k  [0603-RES]  57.91,85.09 180 top
R57  4.7K  [0603-RES]  77.47,87.25 0 top
R58  4.7k  [0603-RES]  73.66,85.09 180 top
R59  4.7K  [0603-RES]  93.22,87.25 0 top
R60  4.7k  [0603-RES]  89.41,85.09 180 top
R61  4.7K  [0603-RES]  108.97,19.18 0 top
R62  4.7k  [0603-RES]  105.16,17.02 180 top
R63  4.7K  [0603-RES]  124.71,19.18 0 top
R64  4.7k  [0603-RES]  120.9,17.02 180 top
R65  4.7K  [0603-RES]  140.46,19.18 0 top
R66  4.7k  [0603-RES]  136.65,17.02 180 top
R67  4.7K  [0603-RES]  108.97,36.2 0 top
R68  4.7k  [0603-RES]  105.16,34.04 180 top
R69  4.7K  [0603-RES]  124.71,36.2 0 top
R70  4.7k  [0603-RES]  120.9,34.04 180 top
R71  4.7K  [0603-RES]  140.46,36.2 0 top
R72  4.7k  [0603-RES]  136.65,34.04 180 top
R73  4.7K  [0603-RES]  108.97,53.21 0 top
R74  4.7k  [0603-RES]  105.16,51.05 180 top
R75  4.7K  [0603-RES]  124.71,53.21 0 top
R76  4.7k  [0603-RES]  120.9,51.05 180 top
R77  4.7K  [0603-RES]  140.46,53.21 0 top
R78  4.7k  [0603-RES]  136.65,51.05 180 top
R79  4.7K  [0603-RES]  108.97,70.23 0 top
R80  4.7k  [0603-RES]  105.16,68.07 180 top
R81  4.7K  [0603-RES]  124.71,70.23 0 top
R82  4.7k  [0603-RES]  120.9,68.07 180 top
R83  4.7K  [0603-RES]  140.46,70.23 0 top
R84  4.7k  [0603-RES]  136.65,68.07 180 top
R85  4.7K  [0603-RES]  108.97,87.25 0 top
R86  4.7k  [0603-RES]  105.16,85.09 180 top
R87  4.7K  [0603-RES]  124.71,87.25 0 top
R88  4.7k  [0603-RES]  120.9,85.09 180 top
R89  4.7K  [0603-RES]  140.46,87.25 0 top
R90  4.7k  [0603-RES]  136.65,85.09 180 top
U1  ADXL3451:1  [LGA14]  10.67,13.21 90 top
U2  ADXL3451:1  [LGA14]  26.42,13.21 90 top
U3  ITG-32001:1  [QFN-24_ITG3200_1:1]  17.02,13.21 90 top
U4  ITG-32001:1  [QFN-24_ITG3200_1:1]  32.77,13.21 90 top
U5  ADXL3451:1  [LGA14]  42.16,13.21 90 top
U6  ITG-32001:1  [QFN-24_ITG3200_1:1]  48.51,13.21 90 top
U7  ADXL3451:1  [LGA14]  10.67,30.23 90 top
U8  ITG-32001:1  [QFN-24_ITG3200_1:1]  17.02,30.23 90 top
U9  ADXL3451:1  [LGA14]  26.42,30.23 90 top
U10  ITG-32001:1  [QFN-24_ITG3200_1:1]  32.77,30.23 90 top
U11  ADXL3451:1  [LGA14]  42.16,30.23 90 top
U12  ITG-32001:1  [QFN-24_ITG3200_1:1]  48.51,30.23 90 top
U13  ADXL3451:1  [LGA14]  10.67,47.24 90 top
U14  ITG-32001:1  [QFN-24_ITG3200_1:1]  17.02,47.24 90 top
U15  ADXL3451:1  [LGA14]  26.42,47.24 90 top
U16  ITG-32001:1  [QFN-24_ITG3200_1:1]  32.77,47.24 90 top
U17  ADXL3451:1  [LGA14]  42.16,47.24 90 top
U18  ITG-32001:1  [QFN-24_ITG3200_1:1]  48.51,47.24 90 top
U19  ADXL3451:1  [LGA14]  10.67,64.26 90 top
U20  ITG-32001:1  [QFN-24_ITG3200_1:1]  17.02,64.26 90 top
U21  ADXL3451:1  [LGA14]  26.42,64.26 90 top
U22  ITG-32001:1  [QFN-24_ITG3200_1:1]  32.77,64.26 90 top
U23  ADXL3451:1  [LGA14]  42.16,64.26 90 top
U24  ITG-32001:1  [QFN-24_ITG3200_1:1]  48.51,64.26 90 top
U25  ADXL3451:1  [LGA14]  10.67,81.28 90 top
U26  ITG-32001:1  [QFN-24_ITG3200_1:1]  17.02,81.28 90 top
U27  ADXL3451:1  [LGA14]  26.42,81.28 90 top
U28  ITG-32001:1  [QFN-24_ITG3200_1:1]  32.77,81.28 90 top
U29  ADXL3451:1  [LGA14]  42.16,81.28 90 top
U30  ITG-32001:1  [QFN-24_ITG3200_1:1]  48.51,81.28 90 top
U31  ADXL3451:1  [LGA14]  57.91,13.21 90 top
U32  ITG-32001:1  [QFN-24_ITG3200_1:1]  64.26,13.21 90 top
U33  ADXL3451:1  [LGA14]  73.66,13.21 90 top
U34  ITG-32001:1  [QFN-24_ITG3200_1:1]  80.01,13.21 90 top
U35  ADXL3451:1  [LGA14]  89.41,13.21 90 top
U36  ITG-32001:1  [QFN-24_ITG3200_1:1]  95.76,13.21 90 top
U37  ADXL3451:1  [LGA14]  57.91,30.23 90 top
U38  ITG-32001:1  [QFN-24_ITG3200_1:1]  64.26,30.23 90 top
U39  ADXL3451:1  [LGA14]  73.66,30.23 90 top
U40  ITG-32001:1  [QFN-24_ITG3200_1:1]  80.01,30.23 90 top
U41  ADXL3451:1  [LGA14]  89.41,30.23 90 top
U42  ITG-32001:1  [QFN-24_ITG3200_1:1]  95.76,30.23 90 top
U43  ADXL3451:1  [LGA14]  57.91,47.24 90 top
U44  ITG-32001:1  [QFN-24_ITG3200_1:1]  64.26,47.24 90 top
U45  ADXL3451:1  [LGA14]  73.66,47.24 90 top
U46  ITG-32001:1  [QFN-24_ITG3200_1:1]  80.01,47.24 90 top
U47  ADXL3451:1  [LGA14]  89.41,47.24 90 top
U48  ITG-32001:1  [QFN-24_ITG3200_1:1]  95.76,47.24 90 top
U49  ADXL3451:1  [LGA14]  57.91,64.26 90 top
U50  ITG-32001:1  [QFN-24_ITG3200_1:1]  64.26,64.26 90 top
U51  ADXL3451:1  [LGA14]  73.66,64.26 90 top
U52  ITG-32001:1  [QFN-24_ITG3200_1:1]  80.01,64.26 90 top
U53  ADXL3451:1  [LGA14]  89.41,64.26 90 top
U54  ITG-32001:1  [QFN-24_ITG3200_1:1]  95.76,64.26 90 top
U55  ADXL3451:1  [LGA14]  57.91,81.28 90 top
U56  ITG-32001:1  [QFN-24_ITG3200_1:1]  64.26,81.28 90 top
U57  ADXL3451:1  [LGA14]  73.66,81.28 90 top
U58  ITG-32001:1  [QFN-24_ITG3200_1:1]  80.01,81.28 90 top
U59  ADXL3451:1  [LGA14]  89.41,81.28 90 top
U60  ITG-32001:1  [QFN-24_ITG3200_1:1]  95.76,81.28 90 top
U61  ADXL3451:1  [LGA14]  105.16,13.21 90 top
U62  ITG-32001:1  [QFN-24_ITG3200_1:1]  111.51,13.21 90 top
U63  ADXL3451:1  [LGA14]  120.9,13.21 90 top
U64  ITG-32001:1  [QFN-24_ITG3200_1:1]  127.25,13.21 90 top
U65  ADXL3451:1  [LGA14]  136.65,13.21 90 top
U66  ITG-32001:1  [QFN-24_ITG3200_1:1]  143,13.21 90 top
U67  ADXL3451:1  [LGA14]  105.16,30.23 90 top
U68  ITG-32001:1  [QFN-24_ITG3200_1:1]  111.51,30.23 90 top
U69  ADXL3451:1  [LGA14]  120.9,30.23 90 top
U70  ITG-32001:1  [QFN-24_ITG3200_1:1]  127.25,30.23 90 top
U71  ADXL3451:1  [LGA14]  136.65,30.23 90 top
U72  ITG-32001:1  [QFN-24_ITG3200_1:1]  143,30.23 90 top
U73  ADXL3451:1  [LGA14]  105.16,47.24 90 top
U74  ITG-32001:1  [QFN-24_ITG3200_1:1]  111.51,47.24 90 top
U75  ADXL3451:1  [LGA14]  120.9,47.24 90 top
U76  ITG-32001:1  [QFN-24_ITG3200_1:1]  127.25,47.24 90 top
U77  ADXL3451:1  [LGA14]  136.65,47.24 90 top
U78  ITG-32001:1  [QFN-24_ITG3200_1:1]  143,47.24 90 top
U79  ADXL3451:1  [LGA14]  105.16,64.26 90 top
U80  ITG-32001:1  [QFN-24_ITG3200_1:1]  111.51,64.26 90 top
U81  ADXL3451:1  [LGA14]  120.9,64.26 90 top
U82  ITG-32001:1  [QFN-24_ITG3200_1:1]  127.25,64.26 90 top
U83  ADXL3451:1  [LGA14]  136.65,64.26 90 top
U84  ITG-32001:1  [QFN-24_ITG3200_1:1]  143,64.26 90 top
U85  ADXL3451:1  [LGA14]  105.16,81.28 90 top
U86  ITG-32001:1  [QFN-24_ITG3200_1:1]  111.51,81.28 90 top
U87  ADXL3451:1  [LGA14]  120.9,81.28 90 top
U88  ITG-32001:1  [QFN-24_ITG3200_1:1]  127.25,81.28 90 top
U89  ADXL3451:1  [LGA14]  136.65,81.28 90 top
U90  ITG-32001:1  [QFN-24_ITG3200_1:1]  143,81.28 90 top
U$1  OSHW-LOGOS  [OSHW-LOGO-S]  25.15,15.75 0 bottom
U$2  OSHW-LOGOS  [OSHW-LOGO-S]  9.4,15.75 0 bottom
U$3  OSHW-LOGOS  [OSHW-LOGO-S]  40.89,15.75 0 bottom
U$4  OSHW-LOGOS  [OSHW-LOGO-S]  9.4,32.77 0 bottom
U$5  OSHW-LOGOS  [OSHW-LOGO-S]  25.15,32.77 0 bottom
U$6  OSHW-LOGOS  [OSHW-LOGO-S]  40.89,32.77 0 bottom
U$7  OSHW-LOGOS  [OSHW-LOGO-S]  9.4,49.78 0 bottom
U$8  OSHW-LOGOS  [OSHW-LOGO-S]  25.15,49.78 0 bottom
U$9  OSHW-LOGOS  [OSHW-LOGO-S]  40.89,49.78 0 bottom
U$10  OSHW-LOGOS  [OSHW-LOGO-S]  9.4,66.8 0 bottom
U$11  OSHW-LOGOS  [OSHW-LOGO-S]  25.15,66.8 0 bottom
U$12  OSHW-LOGOS  [OSHW-LOGO-S]  40.89,66.8 0 bottom
U$13  OSHW-LOGOS  [OSHW-LOGO-S]  9.4,83.82 0 bottom
U$14  OSHW-LOGOS  [OSHW-LOGO-S]  25.15,83.82 0 bottom
U$15  OSHW-LOGOS  [OSHW-LOGO-S]  40.89,83.82 0 bottom
U$16  OSHW-LOGOS  [OSHW-LOGO-S]  56.64,15.75 0 bottom
U$17  OSHW-LOGOS  [OSHW-LOGO-S]  72.39,15.75 0 bottom
U$18  OSHW-LOGOS  [OSHW-LOGO-S]  88.14,15.75 0 bottom
U$19  OSHW-LOGOS  [OSHW-LOGO-S]  56.64,32.77 0 bottom
U$20  OSHW-LOGOS  [OSHW-LOGO-S]  72.39,32.77 0 bottom
U$21  OSHW-LOGOS  [OSHW-LOGO-S]  88.14,32.77 0 bottom
U$22  OSHW-LOGOS  [OSHW-LOGO-S]  56.64,49.78 0 bottom
U$23  OSHW-LOGOS  [OSHW-LOGO-S]  72.39,49.78 0 bottom
U$24  OSHW-LOGOS  [OSHW-LOGO-S]  88.14,49.78 0 bottom
U$25  OSHW-LOGOS  [OSHW-LOGO-S]  56.64,66.8 0 bottom
U$26  OSHW-LOGOS  [OSHW-LOGO-S]  72.39,66.8 0 bottom
U$27  OSHW-LOGOS  [OSHW-LOGO-S]  88.14,66.8 0 bottom
U$28  OSHW-LOGOS  [OSHW-LOGO-S]  56.64,83.82 0 bottom
U$29  OSHW-LOGOS  [OSHW-LOGO-S]  72.39,83.82 0 bottom
U$30  OSHW-LOGOS  [OSHW-LOGO-S]  88.14,83.82 0 bottom
U$31  OSHW-LOGOS  [OSHW-LOGO-S]  103.89,15.75 0 bottom
U$32  OSHW-LOGOS  [OSHW-LOGO-S]  119.63,15.75 0 bottom
U$33  OSHW-LOGOS  [OSHW-LOGO-S]  135.38,15.75 0 bottom
U$34  OSHW-LOGOS  [OSHW-LOGO-S]  103.89,32.77 0 bottom
U$35  OSHW-LOGOS  [OSHW-LOGO-S]  119.63,32.77 0 bottom
U$36  OSHW-LOGOS  [OSHW-LOGO-S]  135.38,32.77 0 bottom
U$37  OSHW-LOGOS  [OSHW-LOGO-S]  103.89,49.78 0 bottom
U$38  OSHW-LOGOS  [OSHW-LOGO-S]  119.63,49.78 0 bottom
U$39  OSHW-LOGOS  [OSHW-LOGO-S]  135.38,49.78 0 bottom
U$40  OSHW-LOGOS  [OSHW-LOGO-S]  103.89,66.8 0 bottom
U$41  OSHW-LOGOS  [OSHW-LOGO-S]  119.63,66.8 0 bottom
U$42  OSHW-LOGOS  [OSHW-LOGO-S]  135.38,66.8 0 bottom
U$43  OSHW-LOGOS  [OSHW-LOGO-S]  103.89,83.82 0 bottom
U$44  OSHW-LOGOS  [OSHW-LOGO-S]  119.63,83.82 0 bottom
U$45  OSHW-LOGOS  [OSHW-LOGO-S]  135.38,83.82 0 bottom

## Library data of the parts
C1-C225 JP1-JP270 R1-R90 U$1-U$45 = SparkFun
E$1 E$4 E$6 = SparkFun-Aesthetics
U1-U90 = Testing